# Altium PCB 11.PcbDoc
Units mil, origin at the board's own origin, x right, y up, seen from the top; angles counter-clockwise.
Board outline 4680 x 3125 mil, 2 copper layers (Top Layer, Bottom Layer); 68 components, 60 nets, 224 pads, 6 vias.
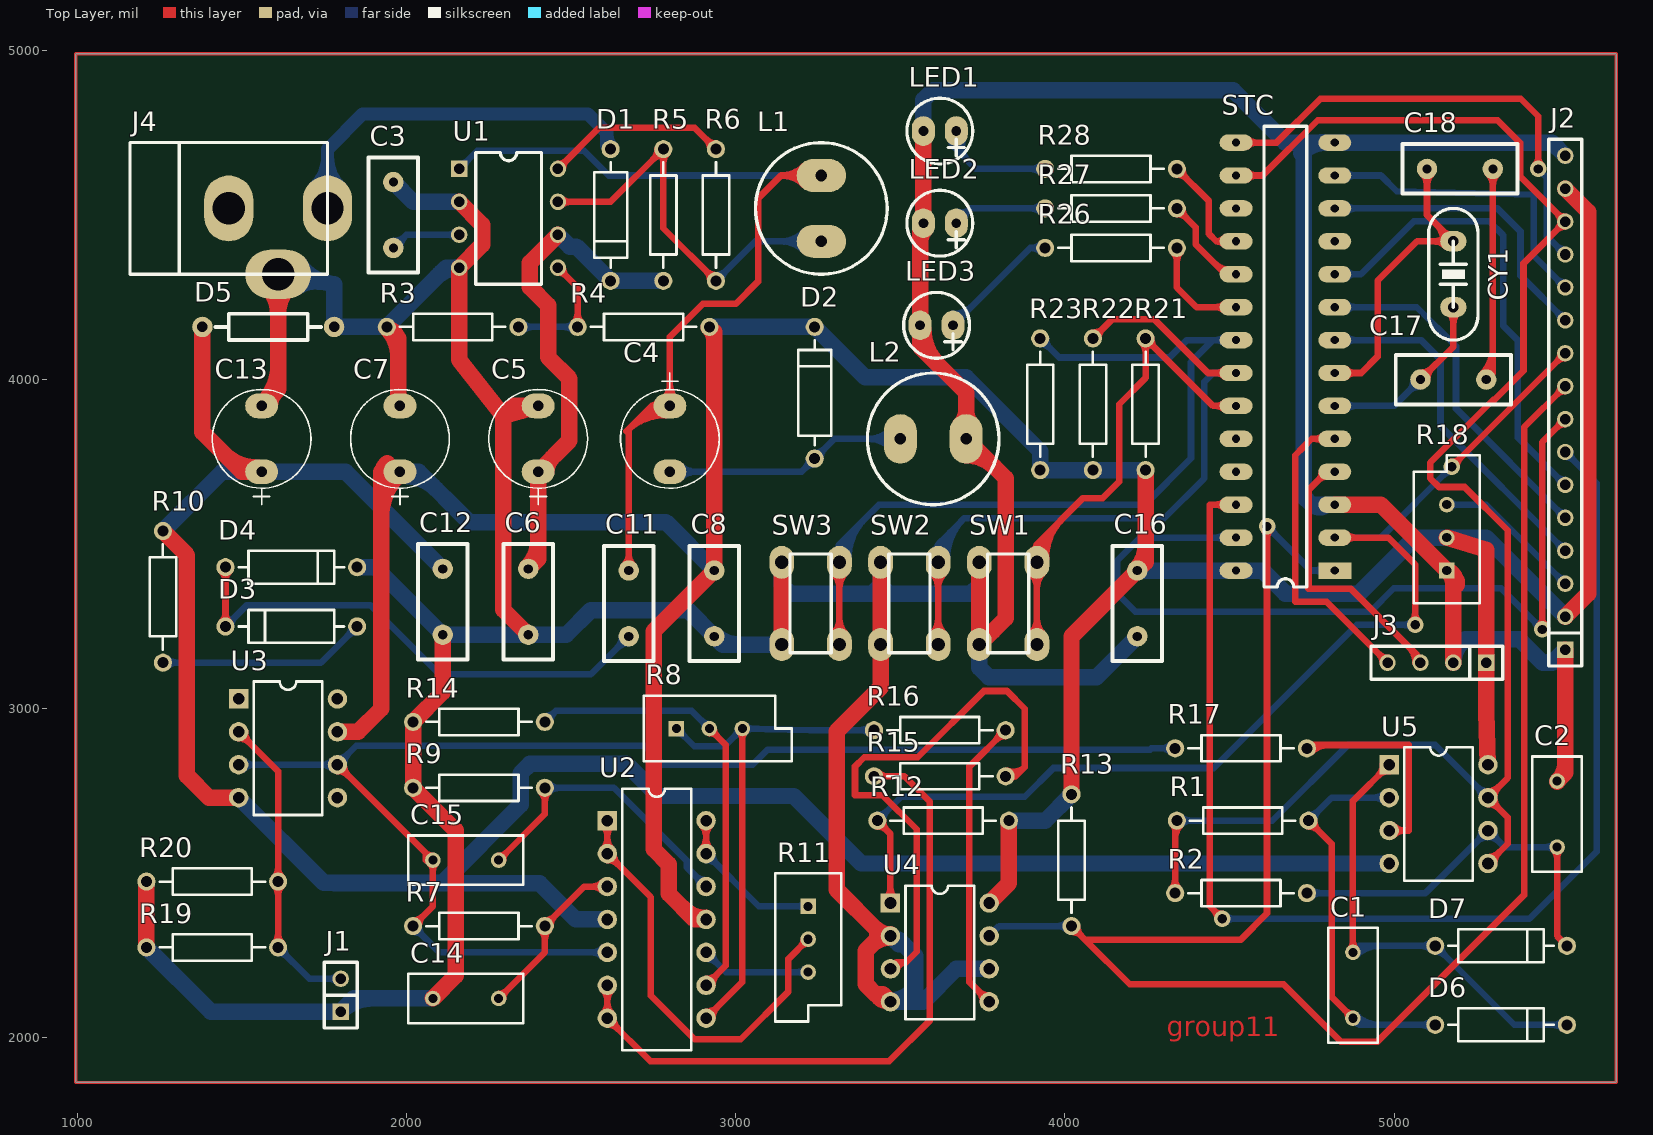
[diagram p0: Top Layer view]
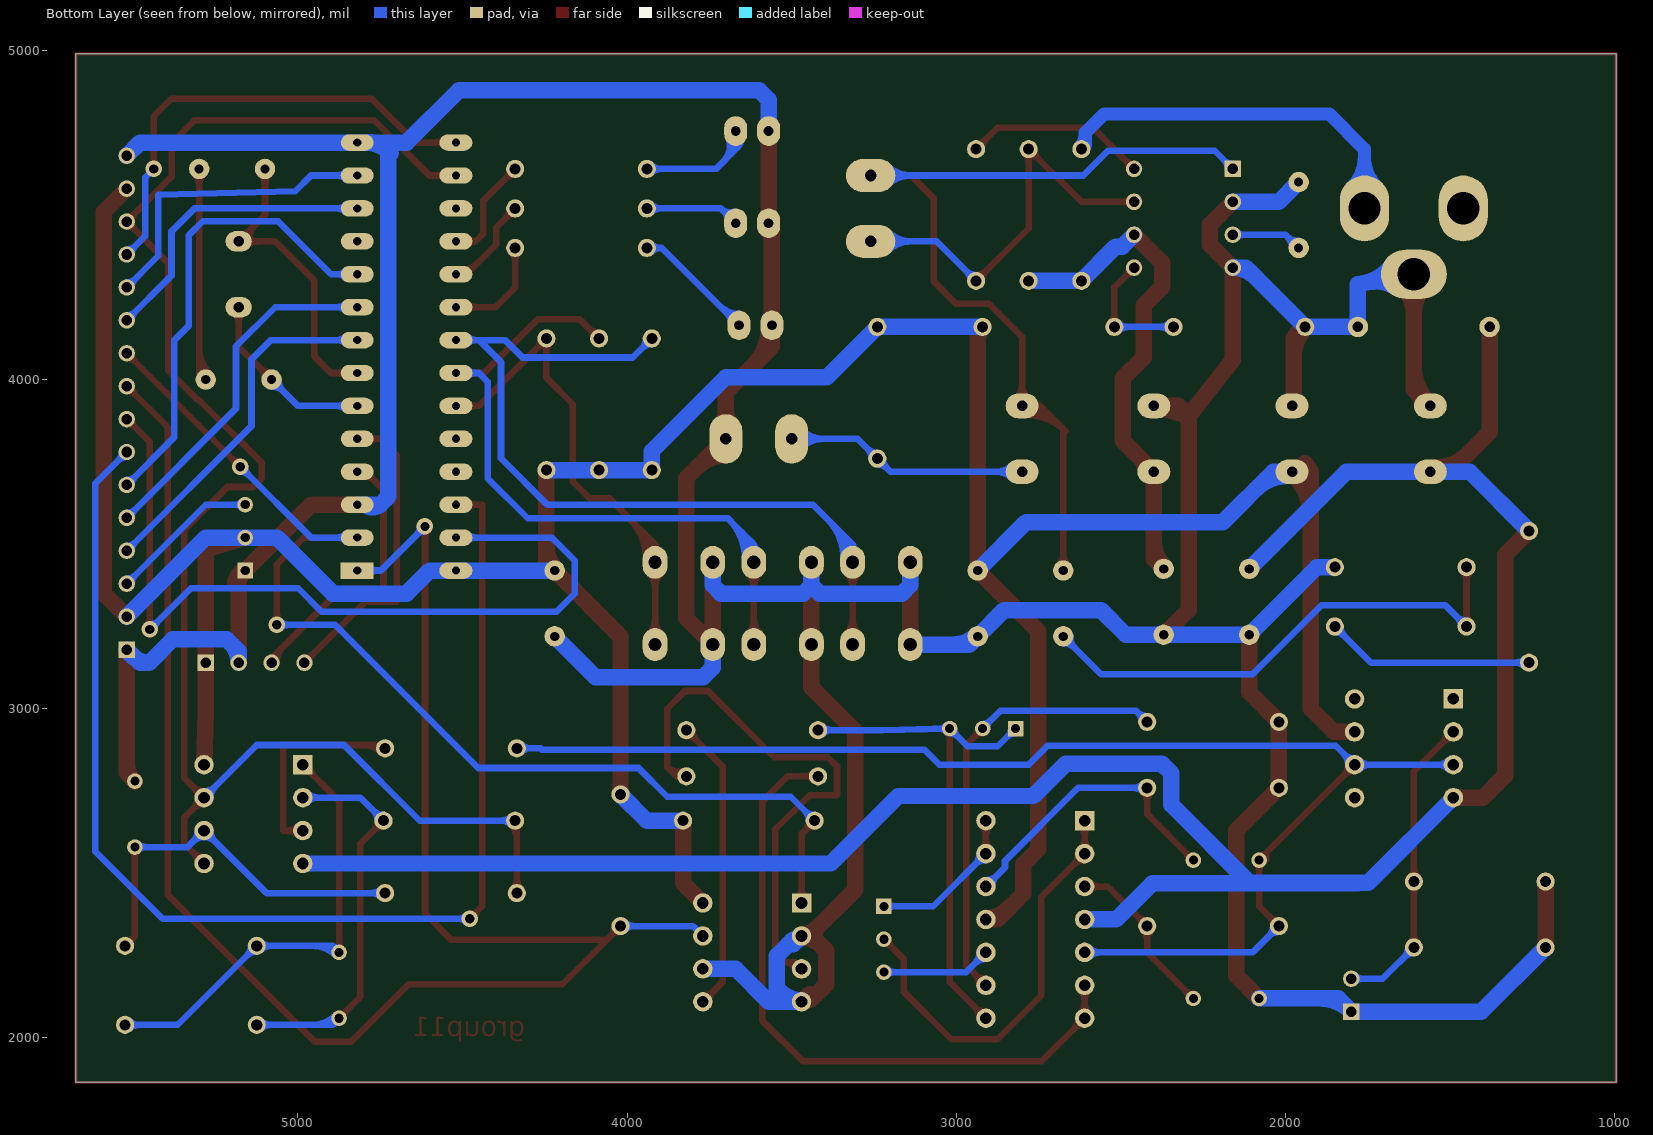
[diagram p1: Bottom Layer view, seen from below]

## Layer stack, top to bottom
Top Solder: solder mask 0.4, Solder Resist, Dk 3.5
Top Layer: signal copper 1.4
Dielectric1: dielectric 12.6, FR-4, Dk 4.8
Bottom Layer: signal copper 1.4
Bottom Solder: solder mask 0.4, Solder Resist, Dk 3.5

## Board outline
995,4990 995,1865 5675,1865 5675,4990 995,4990

## Design rules (kind name [scope] priority, off if disabled: settings)
Clearance [All] p1: gap=20
FabricationTestPointUsage TestPointUsage [All] p1: valid=0 allowmultiple=FALSE
FabricationTestpoint Testpoint [All] p1: side=3 testpointundercomponent=TRUE minsize=40 maxsize=100 preferedsize=60 minholesize=0 maxholesize=40 preferedholesize=32 testpointgrid=1 allowsidetop=TRUE allowsidebottom=TRUE usegrid=TRUE gridtolerance=0.01
PolygonConnect [All] p1: connectstyle=Relief reliefconductorwidth=10 reliefentries=4 polygonreliefangle="90 Angle" airgapwidth=10
RoutingVias [All] p1: holewidth=28 width=50 viastyle="Through Hole" minholewidth=28 minwidth=50 maxholewidth=28 maxwidth=50
SilkToSolderMaskClearance SilkscreenOverComponentPads [IsPad] p1: minsilkscreentomaskgap=10 clearancetoexposedcopper=TRUE
SolderMaskExpansion [All] p1: expansion=4
Width 12 [InNet('NetD1_1')] p1: maxlimit=60 minlimit=40 preferedwidth=50
Width gnd [InNet('GND')] p2: maxlimit=60 minlimit=40 preferedwidth=50
Width -vcc [InNet('-5V')] p3: maxlimit=60 minlimit=40 preferedwidth=50
Width vcc [InNet('+5V')] p4: maxlimit=60 minlimit=40 preferedwidth=50
Width [All] p5: maxlimit=30 minlimit=15 preferedwidth=20
26 further rules are at their usual default settings.

## Components (designator, comment, footprint, x,y, rotation, side; value= is the part's Value field where it differs from the comment)
C1 "Cap" RAD-0.2 4875,2160 r90 top
C2 "Cap" RAD-0.2 5495,2680 r270 top
C3 "471" RAD0.2 1960,4600 r270 top
C4 "47uF/25V" RB.2/.3 2800,3920 r270 top
C5 "470uF/25V" RB.2/.3 2400,3720 r90 top
C6 "104" RAD0.2 2370,3425 r270 top
C7 "220uF" RB.2/.3 1980,3720 r90 top
C8 "104" RAD0.2 2935,3420 r270 top
C11 "106" RAD0.2 2675,3420 r270 top
C12 "104" RAD0.2 2110,3425 r270 top
C13 "220uF" RB.2/.3 1560,3720 r90 top
C14 "Cap" RAD-0.2 2180,2120 r0 top
C15 "Cap" RAD-0.2 2180,2540 r0 top
C16 "CAP" RAD0.2 4220,3420 r270 top
C17 "33pF" RAD0.2 5080,4000 r0 top
C18 "33pF" RAD0.2 5300,4640 r180 top
CY1 "CRYSTAL" CY2 5180,4420 r270 top
D1 "Diode 1N4148" DIODE-0.4 2620,4500 r270 top
D2 "Diode 1N4148" DIODE-0.4 3240,3960 r90 top
D3 "Diode 1N4148" DIODE-0.4 1650,3250 r180 top
D4 "Diode 1N4148" DIODE-0.4 1650,3430 r0 top
D5 "5.1V" AXIAL0.4 1380,4160 r0 top
D6 "Diode 1N4148" DIODE-0.4 5325,2040 r0 top
D7 "Diode 1N4148" DIODE-0.4 5325,2280 r0 top
J1 "CON2" SIP2 1800,2080 r90 top
J2 "CON16" SIP16 5520,3180 r90 top
J3 "CON4" SIP4 5280,3140 r180 top
J4 "DCINPUT" DC-INPUT 1460,4520 r180 top
L1 "220uH" RB.2/.4 3260,4420 r270 top
L2 "220uH" RB.2/.4 3700,3820 r0 top
LED1 "LED" LED 3670,4755 r180 top
LED2 "LED" LED 3670,4475 r180 top
LED3 "LED" LED 3660,4165 r180 top
R1 "Res2" AXIAL-0.4 4540,2660 r180 top
R2 "Res2" AXIAL-0.4 4535,2440 r180 top
R3 "1.2K" AXIAL-0.4 2140,4160 r0 top
R4 "4.7K" AXIAL-0.4 2720,4160 r180 top
R5 "0.2R" AXIAL-0.4 2780,4500 r90 top
R6 "180R" AXIAL-0.4 2940,4500 r90 top
R7 "20K" AXIAL-0.4 2220,2340 r180 top
R8 "RPot" VR5 2920,2940 r0 top
R9 "20K" AXIAL-0.4 2220,2760 r0 top
R10 "180R" AXIAL-0.4 1260,3340 r270 top
R11 "47K" VR5 3220,2300 r270 top
R12 "Res2" AXIAL-0.4 3630,2660 r180 top
R13 "Res2" AXIAL-0.4 4020,2540 r270 top
R14 "Res2" AXIAL-0.4 2220,2960 r0 top
R15 "5K" AXIAL-0.4 3620,2795 r180 top
R16 "5K" AXIAL-0.4 3620,2935 r180 top
R17 "Res2" AXIAL-0.4 4535,2880 r180 top
R18 "RPot" VR5 5160,3520 r90 top
R19 "Res2" AXIAL-0.4 1410,2275 r0 top
R20 "Res2" AXIAL-0.4 1410,2475 r0 top
R21 "Res2" AXIAL-0.4 4245,3925 r270 top
R22 "Res2" AXIAL-0.4 4085,3925 r270 top
R23 "Res2" AXIAL-0.4 3925,3925 r270 top
R26 "Res2" AXIAL-0.4 4140,4400 r0 top
R27 "Res2" AXIAL-0.4 4140,4520 r0 top
R28 "Res2" AXIAL-0.4 4140,4640 r0 top
STC "STC" stc5616 4820,3420 r180 top
SW1 "SW-PB" SW-BP 3915,3195 r90 top
SW2 "SW-PB" SW-BP 3615,3195 r90 top
SW3 "SW-PB" SW-BP 3315,3195 r90 top
U1 "MC34063" DIP8 2160,4640 r0 top
U2 "LM324" DIP-14 2760,2360 r270 top
U3 "OP-07" DIP-8 1640,2880 r270 top
U4 "LM393" DIP-8 3620,2260 r270 top
U5 "LM358" DIP-8 5135,2680 r270 top

## Footprints (in the part's own frame and the unit in brackets; to place one, negate y for a bottom-side part, rotate by r counter-clockwise, add the part's x,y. Pads: shape width x height; smd on the part's side, far side on the other; paste and mask are expansions set on the pad)
AXIAL0.4 [mil]
  round 62 hole 32: 1(0,0) 2(400,0)
  silkscreen extent 40,-40 360,40
AXIAL-0.4 [mm] "Resistor; 2 Leads"
  round 1.4 hole 0.85: 1(-5.08,0) 2(5.08,0)
  silkscreen extent -4.06,-1.02 4.06,1.02
CY2 [mil]
  oval 62x80 hole 32: 1(0,0) 2(200,0)
  silkscreen extent -100,-75 300,75
DC-INPUT [mm]
  oval 3.81x5.08 hole 2.5: 1(-7.62,0) 3(0,0)
  oval 5.08x3.81 hole 2.5: 2(-3.81,5.08)
  silkscreen extent -7.62,-5.08 7.62,5.08
DIODE-0.4 [mm] "Tunnel Diode - Dependent Source Model; 2 Leads"
  round 1.4 hole 0.85: 1(-5.08,0) 2(5.08,0)
  silkscreen extent -4.06,-1.27 4.06,1.27
DIP8 [mil]
  rect 50x50 hole 32: 1(0,0)
  round 50 hole 32: 2(0,-100) 3(0,-200) 4(0,-300) 5(300,-300) 6(300,-200) 7(300,-100) 8(300,0)
  silkscreen extent 50,-350 250,50
DIP-8 [mm] "DIP; 8 Leads; Row Spacing 7.62 mm; Pitch 2.54 mm"
  rect 1.5x1.5 hole 0.9: 1(-3.81,-3.81)
  round 1.5 hole 0.9: 2(-1.27,-3.81) 3(1.27,-3.81) 4(3.81,-3.81) 5(3.81,3.81) 6(1.27,3.81) 7(-1.27,3.81) 8(-3.81,3.81)
  silkscreen extent -5.15,-2.65 5.15,2.65
DIP-14 [mm] "DIP; 14 Leads; Row Spacing 7.62 mm; Pitch 2.54 mm"
  rect 1.5x1.5 hole 0.9: 1(-7.62,-3.81)
  round 1.5 hole 0.9: 2(-5.08,-3.81) 3(-2.54,-3.81) 4(0,-3.81) 5(2.54,-3.81) 6(5.08,-3.81) 7(7.62,-3.81) 8(7.62,3.81) 9(5.08,3.81) 10(2.54,3.81) 11(0,3.81) 12(-2.54,3.81) 13(-5.08,3.81) 14(-7.62,3.81)
  silkscreen extent -10.1,-2.65 10.1,2.65
LED [mil]
  oval 70x90 hole 30: A(0,0) K(100,0)
  silkscreen extent -50,-100 150,100
RAD0.2 [mil]
  round 62 hole 28: 1(0,0) 2(200,0)
  silkscreen extent -75,-75 275,75
RAD-0.2 [mm] "Jumper Wire; 2 Leads"
  round 1.2 hole 0.7: 1(-2.54,0) 2(2.54,0)
  silkscreen extent -4.44,-1.91 4.44,1.91
RB.2/.3 [mil]
  oval 75x100 hole 32: 1(0,0) 2(200,0)
  silkscreen extent -100,-150 250,150
RB.2/.4 [mil]
  oval 100x150 hole 35: 1(0,0) 2(-200,0)
  silkscreen extent -300,-200 100,200
SIP2 [mil]
  rect 50x50 hole 32: 1(0,0)
  round 50 hole 32: 2(100,0)
  silkscreen extent -50,-50 150,50
SIP4 [mil]
  rect 50x50 hole 32: 1(0,0)
  round 50 hole 32: 2(100,0) 3(200,0) 4(300,0)
  silkscreen extent -50,-50 350,50
SIP16 [mil]
  rect 50x50 hole 32: 1(0,0)
  round 50 hole 32: 2(100,0) 3(200,0) 4(300,0) 5(400,0) 6(500,0) 7(600,0) 8(700,0) 9(800,0) 10(900,0) 11(1000,0) 12(1100,0) 13(1200,0) 14(1300,0) 15(1400,0) 16(1500,0)
  silkscreen extent -50,-50 1550,50
stc5616 [mil]
  rect 100x50 hole 25: 1(0,0)
  oval 100x50 hole 25: 2(0,-100) 3(0,-200) 4(0,-300) 5(0,-400) 6(0,-500) 7(0,-600) 8(0,-700) 9(0,-800) 10(0,-900) 11(0,-1000) 12(0,-1100) 13(0,-1200) 14(0,-1300) 15(300,-1300) 16(300,-1200) 17(300,-1100) 18(300,-1000) 19(300,-900) 20(300,-800) 21(300,-700) 22(300,-600) 23(300,-500) 24(300,-400) 25(300,-300) 26(300,-200) 27(300,-100) 28(300,0)
  silkscreen extent 85,-1350 215,50
SW-BP [mil]
  oval 100x75 hole 40: 1(0,0) 1(250,0) 2(0,175) 2(250,175)
  silkscreen extent -25,25 275,150
VR5 [mm] "Potentiometer; 3 Leads"
  rect 1.2x1.2 hole 0.7: 1(-2.54,0)
  round 1.2 hole 0.7: 2(0,0) 3(2.54,0)
  silkscreen extent -5.08,-2.54 6.35,2.54

## Part data
C1 C2 C14 C15: "Capacitor"
C3 C6 C8 C11 C12: library part CAP, "Capacitor"
C4 C5 C7 C13: library part ELECTRO2, "Electrolytic Capacitor"
C17 C18: library part CAP
D1 D2 D3 D4 D6 D7: "High Conductance Fast Diode"
D5: library part ZENER2, "Zener Diode"
J4: library part PWR2.5, "Low Voltage Power Supply Connector"
L1 L2: library part INDUCTOR2
R1 R2 R12 R13 R14 R17 R19 R20 R21 R22 R23 R26 R27 R28: "Resistor"
R3 R4 R5 R6 R7 R9 R10 R15 R16: library part Res2, "Resistor"
R8 R18: "Potentiometer"
R11: library part RPot, "Potentiometer"
STC: library part Component_1

## Via types
v1: diameter 50, hole 28, Top Layer to Bottom Layer, 6 vias

## Nets (pads, with @x,y where several pads share a name; then routed paths per layer and width w, separated by ;. In a path a pad name is that pad's centre, name@x,y a point inside that pad or via, vN(x,y) a via of type N, cw(c..) or ccw(c..) an arc to the next point about the centre after c; other vN are vias at no path point)
+5V: C7.1 C8.1 C16.1 D2.2 J2.2 J2.15 J3.1 R4.1 R12.1 R13.1 R18.2 R21.2 R22.2 R23.2 STC.28 U2.11 U3.7 U4.8 U5.8 | length 11301.5
  Top Layer w50: U3.7 1853,2930 1923,3000 1923,3720 C7.1 ; 1923,3582.39 cw(c2105.11,3582.39) C7.1@1976.34,3711.16 ; 1923,3703.1 cw(c1984.4,3703.1) C7.1@1940.98,3746.52 ; 2842.52,2392.48 ccw(c2910,2459.96) U2.11@2910,2364.53 ; U2.11 2875,2360 2796.63,2438.37 2796.63,2527.38 2751,2573.01 2751,3236 C8.1 2935,4145 R4.1 ; R4.1@2918.19,4158.19 cw(c2877.61,4117.61) 2935,4117.61 ; U4.8 3830,2470 R12.1 ; R13.1 4020,3220 C16.1 4245,3445 R21.2 ; C16.1@4215.76,3424.24 ccw(c4145.16,3494.84) 4245,3494.84 ; R18.2 5280,3483 J3.1 5280,2990 U5.8 ; J2.2 5590,3350 5590,4510 J2.15
  Bottom Layer w50: C7.1 2037,3720 2190,3567 2788,3567 C8.1 ; C7.1@1992.5,3707.5 cw(c1992.5,3569.89) 2089.81,3667.19 ; C7.1@1997.76,3708.66 cw(c2020.7,3659.2) 2059.25,3697.75 ; R4.1 D2.2 3393,4007 3700,4007 3925,3782 R23.2 R22.2 R21.2 ; R12.1 3940,2660 R13.1 ; C16.1 STC.28 4600,3420 4670,3350 4893.5,3350 5063.5,3520 R18.2 5280,3520 J2.2
-5V: C12.1 C13.1 D5.1 R10.1 U2.4 U3.4 U5.4 | length 7808.5
  Top Layer w50: R10.1 1333,3467 1333,2797 1400,2730 U3.4 ; D5.1 1380,3840 1500,3720 C13.1 ; 1445.07,3774.93 ccw(c1547.5,3877.35) C13.1@1547.5,3732.5
  Bottom Layer w50: R10.1 1440,3720 C13.1 1815,3720 C12.1 ; U3.4 1749,2471 1779,2471 ; U2.4 2514,2360 2404,2470 1780,2470 1779,2471 ; U5.4 3381,2530 3176,2735 2765.63,2735 2668.07,2832.56 2375,2832.56 2347,2804.56 2347,2709 2109,2471 ; 1779,2471 2109,2471 ; 1779,2471 2109,2471
"E P34": J2.6 STC.10 | length 1546.2
  Bottom Layer w20: STC.10 4899,4320 5060,4481 5289.04,4481 5331,4439.04 5331,4164 5376,4119 5376,3824 J2.6 ; STC.10@4855.61,4309.39 cw(c4881.21,4283.79) 4881.21,4320 cw(c4881.21,4356.21) STC.10@4855.61,4330.61 ; J2.6@5505,3680 ccw(c5468.79,3680) 5494.39,3705.61 ccw(c5520,3731.21) J2.6@5520,3695
GND: C2.1 C3.1 C5.2 C6.2 C7.2 C8.2 C12.2 C13.2 C14.1 C16.2 D4.2 D5.2 J1.1 J2.1 J2.16 J3.2 J4.2 L2.1 LED1.K LED2.K LED3.K R3.1 R9.1 R14.1 R18.1 R19.1 R20.1 STC.3 STC.14 SW1.2 SW2.2 SW3.2 U1.2 U1.4 U4.2 U4.4 U4.6 | length 20586.6
  Top Layer w50: R19.1 R20.1 ; C13.2 1610,3970 J4.2 ; C13.2@1563.66,3928.84 ccw(c1451.79,4040.71) 1610,4040.71 ; J4.2@1574.64,4284.64 cw(c1489.29,4199.29) 1610,4199.29 cw(c1730.71,4199.29) J4.2@1645.36,4284.64 ; C13.2@1585,3920 cw(c1645.36,3920) 1602.68,3962.68 ; R3.1@1938.19,4158.19 cw(c1849.32,4069.32) 1975,4069.32 ; R3.1@1939.31,4157.54 cw(c1926.17,4110.5) 1975,4110.5 ; R3.1 1975,4125 1975,3925 C7.2 ; 1975,3962.25 ccw(c2022.25,3962.25) C7.2@1988.84,3928.84 ; C14.1 2149,2189 2149,2631 R9.1 R14.1 2110,3050 C12.2 ; U1.2 2230,4470 2230,4410 U1.4 2160,4060 2294,3889 ; 2293.75,3888.75 cw(c2353.67,3828.83) C5.2@2383.15,3908.28 ; 2351.39,3905.78 ccw(c2339.56,3946.25) C5.2@2376.54,3926 ; C6.2 2294,3301 2294,3889 ; SW3.2@3140,3195 SW3.2@3140,3445 ; 3411.06,2281.06 cw(c3470,2222.12) U4.2@3470,2305.47 ; 3415,2285 cw(c3464.85,2235.16) U4.2@3469.69,2305.48 ; 3423.53,2333.78 ccw(c3470,2380.25) U4.2@3470,2314.53 ; 3424.71,2133.29 ccw(c3470,2178.57) U4.4@3470,2114.53 ; 3436,2122 ccw(c3458.52,2144.52) U4.4@3468.57,2114.3 ; SW2.2@3440,3445 3440,3195 3440,3065 3307.44,2932.44 3307.44,2449.87 3430,2327.31 3430,2310 3430,2300 3395.47,2265.47 3395.47,2162.53 3425,2133 ; U4.4@3465.97,2107.94 ccw(c3425,2086.99) 3425,2133 ; U4.4 3447,2133 3425,2133 ; 3560,4416.72 cw(c3618.28,4416.72) LED2.K@3577.07,4457.93 ; LED3.K@3570,4155 ccw(c3726.92,4155) 3615.96,4044.04 ; LED1.K LED2.K 3560,4465 LED3.K 3560,4100 3700,3960 L2.1 3820,3700 3820,3275 3740,3195 SW1.2@3740,3445 ; L2.1@3682.32,3862.68 ccw(c3639.64,3905.36) 3700,3905.36 ccw(c3760.36,3905.36) L2.1@3717.68,3862.68 ; L2.1@3700,3770 cw(c3700,3649.29) 3785.36,3734.64 ; SW1.2@3740,3220 ccw(c3740,3280.36) 3782.68,3237.68 ; STC.3 4960,3620 R18.1 5191,3389 5180,3378 J3.2 ; R18.1@5160.51,3421.28 cw(c5142.37,3376.16) 5191,3376.16 ; C2.1 5520,2805 J2.1 ; C2.1@5495.97,2779.03 ccw(c5437.97,2837.03) 5520,2837.03 ; 2294,3889 C5.2 2325,3920 2294,3889 ; R18.1@5160.97,3420.97 cw(c5115.04,3375.04) 5180,3375.04 ccw(c5115.04,3375.04) R18.1@5160.97,3420.97
  Bottom Layer w50: R19.1 1405,2080 J1.1 ; J4.2 1780,4290 D5.2 R3.1 2120,4340 U1.4 ; J4.2@1663.67,4279.04 cw(c1724.39,4192.3) 1742.79,4296.57 ; J4.2@1675.96,4348.67 ccw(c1787,4426.4) 1763.45,4292.92 ; D4.2 1905,3430 C12.2 C6.2 2485,3225 2560,3300 2855,3300 C8.2 2960,3195 SW3.2@3140,3195 ; 1896.57,2120 ccw(c1896.57,1983.43) J1.1 ; C3.1 2020,4540 U1.2 ; C14.1 1840,2120 J1.1 ; 2091.72,4311.72 cw(c2160,4243.43) U1.4 ; 2100,4320 cw(c2150,4270.01) U1.4 ; C8.2@2939.24,3224.24 ccw(c3009.84,3294.84) 3009.84,3195 ; SW3.2@3140,3445 3140,3375 3165,3350 3415,3350 3440,3375 ; SW2.2@3440,3445 3440,3375 ; U4.4@3470,2114.53 ccw(c3470,2209.96) 3537.48,2142.48 ; U4.2 3495,2285 3510,2285 ; U4.2@3474.33,2311.33 ccw(c3510,2322.33) 3510,2285 ; LED1.K 3570,4850 3599,4879 4511,4879 4670,4720 4750,4720 ; SW1.2@3740,3195 3740,3125 3769,3096 4096,3096 C16.2 ; SW1.2@3740,3445 3740,3375 3715,3350 3465,3350 3440,3375 ; U4.6 3670,2210 3570,2110 3505,2110 ; 4718.18,4688.18 cw(c4795,4611.36) 4795,4720 ccw(c4783.75,4641.26) 4727.5,4697.5 ; 4747.5,3622.5 ccw(c4772.64,3647.64) STC.3@4795,3620 ; STC.3 4750,3620 4725,3645 4725,4695 4750,4720 ; 5204.75,3199.75 ccw(c5264.5,3140) J3.2 5180,3175 5216,3211 5380,3211 5451,3140 ; J2.16 5480,4720 STC.14 4750,4720 ; 3505,2110 U4.4 3505,2110 ; 3505,2110 3545,2150 3545,2250 3510,2285 ; 5451,3140 ccw(c5451,3219.51) J2.1 5480,3140 5451,3140 ; U4.2@3470,2305.47 cw(c3470,2258.33) 3503.34,2291.66 ccw(c3470,2258.33) U4.2@3470,2305.47
NetC1_1: C1.1 D6.1 R1.1 U5.2 | length 1634.7
  Top Layer w20: R1.1@4740,2642.44 cw(c4740,2600.05) 4769.98,2630.02 cw(c4799.95,2660) R1.1@4757.56,2660 ; R1.1 4810,2590 4810,2125 C1.1 ; C1.1@4861.38,2060 ccw(c4828.49,2060) 4851.75,2083.25 ccw(c4875,2106.51) C1.1@4875,2073.62
  Bottom Layer w20: R1.1 4810,2730 U5.2 ; R1.1@4740,2677.56 ccw(c4740,2719.95) 4769.98,2689.98 ccw(c4799.95,2660) R1.1@4757.56,2660 ; C1.1@4870.49,2055.49 ccw(c4907.89,2092.89) 4907.89,2040 ; C1.1 4895,2040 D6.1 ; C1.1@4884.63,2069.63 ccw(c4956.17,2141.17) 4956.17,2040 ; U5.2@4971.19,2716.19 ccw(c4937.86,2682.86) 4937.86,2730 ccw(c4937.86,2777.14) U5.2@4971.19,2743.81 ; D6.1@5112.58,2027.58 ccw(c5082.61,1997.61) 5082.61,2040 ccw(c5082.61,2082.39) D6.1@5112.58,2052.42
NetC1_2: C1.2 D6.2 D7.1 U5.1 | length 1819.7
  Top Layer w20: C1.2@4865.37,2269.63 ccw(c4842.11,2292.89) 4875,2292.89 ccw(c4907.89,2292.89) C1.2@4884.63,2269.63 ; C1.2 4875,2720 U5.1 ; U5.1@4965.47,2830 cw(c4918.33,2830) 4951.66,2796.66 cw(c4985,2763.33) U5.1@4985,2810.47
  Bottom Layer w20: C1.2@4870.49,2264.51 cw(c4907.89,2227.11) 4907.89,2280 ; C1.2 4895,2280 D7.1 5365,2040 D6.2 ; C1.2@4884.63,2250.37 cw(c4956.17,2178.83) 4956.17,2280 ; D7.1@5112.58,2267.58 ccw(c5082.61,2237.61) 5082.61,2280 ccw(c5082.61,2322.39) D7.1@5112.58,2292.42 ; D7.1@5125,2262.44 cw(c5125,2220.05) 5154.98,2250.02 cw(c5184.95,2280) D7.1@5142.56,2280 ; D6.2@5512.58,2027.58 ccw(c5482.61,1997.61) 5482.61,2040 ccw(c5482.61,2082.39) D6.2@5512.58,2052.42
NetC2_2: C2.2 D7.2 R2.1 U5.6 | length 1489.8
  Top Layer w20: C2.2@5485.37,2570.37 cw(c5462.11,2547.11) 5495,2547.11 cw(c5527.89,2547.11) C2.2@5504.63,2570.37 ; C2.2 5495,2310 D7.2
  Bottom Layer w20: R2.1 5095,2440 U5.6 5335,2580 C2.2 ; R2.1@4747.42,2427.58 cw(c4777.39,2397.61) 4777.39,2440 cw(c4777.39,2482.39) R2.1@4747.42,2452.42 ; U5.6@5265.47,2630 cw(c5218.33,2630) 5251.66,2596.66 cw(c5285,2563.33) 5285,2610.47 cw(c5285,2563.33) 5318.34,2596.66 cw(c5351.67,2630) U5.6@5304.53,2630 ; C2.2@5485.37,2570.37 ccw(c5462.11,2547.11) 5462.11,2580 ccw(c5462.11,2612.89) C2.2@5485.37,2589.63
NetC3_2: C3.2 U1.3 | length 353.1
  Bottom Layer w20: C3.2 2000,4440 U1.3 ; C3.2@1960,4421 ccw(c1960,4471.7) 1995.85,4435.85 ccw(c2031.7,4400) C3.2@1981,4400 ; U1.3@2149.39,4429.39 ccw(c2123.79,4403.79) 2123.79,4440 ccw(c2123.79,4476.21) U1.3@2149.39,4450.61
NetC4_1: C4.1 C11.1 L1.2 U1.1 | length 3729.3
  Top Layer w20: C11.1@2660.15,3434.85 ccw(c2624.3,3470.7) 2675,3470.7 ccw(c2725.7,3470.7) C11.1@2689.85,3434.85 ; 2668,3843 cw(c2787.5,3723.51) C4.1@2787.5,3892.5 ; C11.1 2675,3850 2745,3920 ; 2702.14,3877.14 cw(c2787.5,3791.79) C4.1@2787.5,3912.5 ; 2723.75,3898.75 cw(c2746.84,3875.66) C4.1@2768.92,3899.73 ; 2736.29,3911.29 cw(c2787.5,3860.07) C4.1@2787.5,3932.5 ; 2738.52,3913.52 cw(c2760.97,3891.07) C4.1@2782.43,3914.47 ; C4.1@2762.41,3908.73 ccw(c2745,3900.91) 2745,3920 ; C4.1@2762.41,3931.27 cw(c2745,3939.09) 2745,3920 ; C4.1@2780.55,3939.45 ccw(c2733.61,3986.39) 2800,3986.39 ccw(c2866.39,3986.39) C4.1@2819.45,3939.45 ; L1.2@3206.72,4591.72 ccw(c3138.43,4523.43) 3138.43,4620 ccw(c3138.43,4716.57) L1.2@3206.72,4648.28 ; L1.2 3138,4620 3068,4550 3068,4298 3000,4230 2900,4230 2800,4130 C4.1 2745,3920
  Bottom Layer w20: U1.1 2215,4695 2539,4695 2614,4620 L1.2 ; U1.1@2160,4655 ccw(c2160,4691.21) 2185.61,4665.61 ccw(c2211.21,4640) U1.1@2175,4640 ; L1.2@3206.72,4591.72 ccw(c3138.43,4523.43) 3138.43,4620 ccw(c3138.43,4716.57) L1.2@3206.72,4648.28
NetC4_2: C4.2 D2.1 L2.2 | length 1130.6
  Bottom Layer w20: C4.2 3200,3720 D2.1 3300,3820 L2.2 ; C4.2@2831.95,3700.55 cw(c2878.89,3653.61) 2878.89,3720 cw(c2878.89,3786.39) C4.2@2831.95,3739.45 ; D2.1@3222.44,3760 cw(c3180.05,3760) 3210.02,3730.02 cw(c3240,3700.05) D2.1@3240,3742.44 ; D2.1@3240,3777.56 ccw(c3240,3819.95) 3269.98,3789.98 ccw(c3299.95,3760) D2.1@3257.56,3760 ; L2.2@3471.72,3791.72 ccw(c3403.43,3723.43) 3403.43,3820 ccw(c3403.43,3916.57) L2.2@3471.72,3848.28
NetC5_1: C5.1 C6.1 D1.2 R5.1 U1.6 | length 1668.9
  Top Layer w50: C6.1@2365.76,3429.24 ccw(c2283.09,3511.91) 2400,3511.91 ; C6.1 2400,3455 C5.1 2495,3815 2495,4003 2430,4068 2430,4226 2375,4281 2375,4355 U1.6 ; C5.1@2425,3720 cw(c2485.36,3720) 2442.68,3762.68
  Bottom Layer w50: U1.6 2496,4404 2516,4404 D1.2 R5.1
NetC11_2: C11.2 D3.2 D4.1 | length 1845.9
  Top Layer w20: D3.2@1437.58,3262.42 ccw(c1407.61,3292.39) 1450,3292.39 ccw(c1492.39,3292.39) D3.2@1462.42,3262.42 ; D4.1@1437.58,3417.58 cw(c1407.61,3387.61) 1450,3387.61 cw(c1492.39,3387.61) D4.1@1462.42,3417.58 ; D3.2 D4.1
  Bottom Layer w20: D3.2 1515,3315 1890,3315 2100,3105 2560,3105 C11.2 ; D3.2@1450,3267.56 ccw(c1450,3309.95) 1479.98,3279.98 ccw(c1509.95,3250) D3.2@1467.56,3250 ; C11.2@2654,3220 cw(c2603.3,3220) 2639.15,3184.15 cw(c2675,3148.3) C11.2@2675,3199
NetC14_2: C14.2 R7.1 U2.3 | length 776.6
  Top Layer w20: C14.2 2420,2260 R7.1 2540,2460 U2.3 ; C14.2@2280,2133.62 ccw(c2280,2166.51) 2303.25,2143.25 ccw(c2326.51,2120) C14.2@2293.62,2120 ; R7.1@2407.58,2327.58 cw(c2377.61,2297.61) 2420,2297.61 cw(c2462.39,2297.61) R7.1@2432.42,2327.58 ; R7.1@2420,2357.56 ccw(c2420,2399.95) 2449.98,2369.98 ccw(c2479.95,2340) R7.1@2437.56,2340 ; U2.3@2596.19,2446.19 ccw(c2562.86,2412.86) 2562.86,2460 ccw(c2562.86,2507.14) U2.3@2596.19,2473.81
NetC15_2: C15.2 R9.2 U2.12 | length 1162.9
  Top Layer w20: C15.2 2420,2680 R9.2 ; C15.2@2280,2553.62 ccw(c2280,2586.51) 2303.25,2563.25 ccw(c2326.51,2540) C15.2@2293.62,2540 ; R9.2@2407.58,2747.58 cw(c2377.61,2717.61) 2420,2717.61 cw(c2462.39,2717.61) R9.2@2432.42,2747.58
  Bottom Layer w20: R9.2 2630,2760 2852,2538 2852,2518 U2.12 ; R9.2@2432.42,2747.58 cw(c2462.39,2717.61) 2462.39,2760 cw(c2462.39,2802.39) R9.2@2432.42,2772.42 ; U2.12@2890.47,2460 ccw(c2843.33,2460) 2876.66,2493.34 ccw(c2910,2526.67) U2.12@2910,2479.53
NetC17_2: C17.2 C18.1 | length 876.9
  Top Layer w20: C17.2@5265.15,4014.85 ccw(c5181.02,4098.98) 5300,4098.98 ; C17.2@5279.29,4000.71 ccw(c5229.3,4050.7) 5300,4050.7 ; C17.2 5300,4020 C18.1 ; C18.1@5285.15,4625.15 cw(c5249.3,4589.3) 5300,4589.3 cw(c5350.7,4589.3) C18.1@5314.85,4625.15
NetD1_1: D1.1 J4.1 | length 1406
  Bottom Layer w40: J4.1@1721.11,4583.89 ccw(c1627.22,4677.78) 1760,4677.78 ccw(c1892.78,4677.78) J4.1@1798.89,4583.89 ; J4.1 1760,4700 1867,4807 2551,4807 2608,4750 2608,4712 D1.1 ; 2608,4747.22 ccw(c2667.22,4747.22) D1.1@2625.35,4705.35
NetD3_1: D3.1 R10.2 | length 768.7
  Bottom Layer w20: R10.2 1740,3140 D3.1 ; R10.2@1272.42,3127.58 cw(c1302.39,3097.61) 1302.39,3140 cw(c1302.39,3182.39) R10.2@1272.42,3152.42 ; D3.1@1832.44,3250 cw(c1790.05,3250) 1820.02,3220.02 cw(c1850,3190.05) D3.1@1850,3232.44
NetJ1_2: J1.2 R19.2 R20.2 U3.2 | length 1331.3
  Top Layer w20: U3.2@1490,2910.47 cw(c1490,2863.33) 1523.34,2896.66 cw(c1556.67,2930) U3.2@1509.53,2930 ; U3.2 1610,2810 R20.2 R19.2 ; R19.2@1597.58,2287.42 ccw(c1567.61,2317.39) 1610,2317.39 ccw(c1652.39,2317.39) R19.2@1622.42,2287.42 ; R20.2@1597.58,2462.58 cw(c1567.61,2432.61) 1610,2432.61 cw(c1652.39,2432.61) R20.2@1622.42,2462.58 ; R20.2@1597.58,2487.42 ccw(c1567.61,2517.39) 1610,2517.39 ccw(c1652.39,2517.39) R20.2@1622.42,2487.42
  Bottom Layer w20: R19.2@1610,2257.44 cw(c1610,2215.05) 1639.98,2245.02 cw(c1669.95,2275) R19.2@1627.56,2275 ; R19.2 1705,2180 J1.2 ; J1.2@1789.39,2169.39 ccw(c1763.79,2143.79) 1763.79,2180 ccw(c1763.79,2216.21) J1.2@1789.39,2190.61
NetJ2_3: J2.3 R18.3 | length 568
  Bottom Layer w20: R18.3 5280,3620 J2.3 ; R18.3@5169.63,3610.37 cw(c5192.89,3587.11) 5192.89,3620 cw(c5192.89,3652.89) R18.3@5169.63,3629.63 ; J2.3@5505,3380 ccw(c5468.79,3380) 5494.39,3405.61 ccw(c5520,3431.21) J2.3@5520,3395
NetJ4_3: J4.3
NetL1_1: L1.1 R5.2 R6.1 U1.7 | length 1697.2
  Top Layer w20: U1.7 2620,4540 R5.2 2780,4460 R6.1 ; U1.7@2470.61,4529.39 cw(c2496.21,4503.79) 2496.21,4540 cw(c2496.21,4576.21) U1.7@2470.61,4550.61 ; R5.2@2762.44,4700 cw(c2720.05,4700) 2750.02,4670.02 cw(c2780,4640.05) R5.2@2780,4682.44 ; R5.2@2767.58,4687.58 cw(c2737.61,4657.61) 2780,4657.61 cw(c2822.39,4657.61) R5.2@2792.42,4687.58 ; R6.1@2922.44,4300 ccw(c2880.05,4300) 2910.02,4329.98 ccw(c2940,4359.95) R6.1@2940,4317.56
  Bottom Layer w20: R6.1 3060,4420 L1.1 ; R6.1@2940,4317.56 ccw(c2940,4359.95) 2969.98,4329.98 ccw(c2999.95,4300) R6.1@2957.56,4300 ; L1.1@3206.72,4391.72 ccw(c3138.43,4323.43) 3138.43,4420 ccw(c3138.43,4516.57) L1.1@3206.72,4448.28
NetLED1_A: LED1.A R28.1 | length 722.8
  Bottom Layer w20: LED1.A@3656.15,4750.77 ccw(c3695.07,4734.55) 3665.26,4704.74 ; LED1.A 3670,4700 ; LED1.A@3674.62,4743.08 ccw(c3724.89,4722.13) 3686.38,4683.62 ; LED1.A@3693.08,4735.39 ccw(c3754.71,4709.71) 3707.5,4662.5 ; R28.1@3927.58,4627.58 ccw(c3897.61,4597.61) 3897.61,4640 ccw(c3897.61,4682.39) R28.1@3927.58,4652.42 ; R28.1 3730,4640 3670,4700 ; 3670,4700 ccw(c3642,4700) 3656.79,4723.77 cw(c3642,4700) 3670,4700 ; 3670,4700 cw(c3698,4700) 3683.21,4723.77 ccw(c3698,4700) 3670,4700
NetLED2_A: LED2.A R27.1 | length 425.9
  Bottom Layer w20: LED2.A 3715,4520 ; LED2.A@3676.09,4509.25 ccw(c3686.06,4548.93) 3715,4520 ; LED2.A@3695,4485 cw(c3731.21,4485) 3705.61,4510.61 ; R27.1@3927.58,4507.58 ccw(c3897.61,4477.61) 3897.61,4520 ccw(c3897.61,4562.39) R27.1@3927.58,4532.42 ; R27.1 3715,4520
NetLED3_A: LED3.A R26.1 | length 538.7
  Bottom Layer w20: LED3.A 3895,4400 R26.1 ; LED3.A@3660,4200 ccw(c3660,4284.5) 3719.75,4224.75 ; LED3.A@3685,4175 cw(c3721.21,4175) 3695.61,4200.61 ; R26.1@3927.58,4387.58 ccw(c3897.61,4357.61) 3897.61,4400 ccw(c3897.61,4442.39) R26.1@3927.58,4412.42
NetR3_2: R3.2 R4.2 U1.5 | length 641.5
  Top Layer w20: U1.5@2460,4325 cw(c2460,4288.79) 2485.61,4314.39 cw(c2511.21,4340) U1.5@2475,4340 ; U1.5 2520,4280 R4.2 ; R4.2@2507.58,4172.42 ccw(c2477.61,4202.39) 2520,4202.39 ccw(c2562.39,4202.39) R4.2@2532.42,4172.42
  Bottom Layer w20: R3.2 R4.2 ; R3.2@2352.42,4147.58 cw(c2382.39,4117.61) 2382.39,4160 cw(c2382.39,4202.39) R3.2@2352.42,4172.42 ; R4.2@2507.58,4147.58 ccw(c2477.61,4117.61) 2477.61,4160 ccw(c2477.61,4202.39) R4.2@2507.58,4172.42
NetR6_2: R6.2 U1.8 | length 682.2
  Top Layer w20: U1.8 2585,4765 2875,4765 R6.2 ; U1.8@2460,4655 ccw(c2460,4691.21) 2485.61,4665.61 ccw(c2511.21,4640) U1.8@2475,4640 ; R6.2@2922.44,4700 ccw(c2880.05,4700) 2910.02,4729.98 ccw(c2940,4759.95) R6.2@2940,4717.56
NetR8_2: R8.2 R14.2 U2.9 | length 1606
  Top Layer w20: U2.9 2970,2220 2970,2890 R8.2 ; U2.9@2910,2179.53 ccw(c2910,2226.67) 2943.34,2193.34 ccw(c2976.67,2160) U2.9@2929.53,2160 ; R8.2@2920,2926.38 cw(c2920,2893.49) 2943.25,2916.75 cw(c2966.51,2940) R8.2@2933.62,2940
  Bottom Layer w20: R14.2 2454,2994 2866,2994 R8.2 ; R14.2@2420,2977.56 ccw(c2420,3019.95) 2449.98,2989.98 ccw(c2479.95,2960) R14.2@2437.56,2960 ; R8.2@2906.38,2940 ccw(c2873.49,2940) 2896.75,2963.25 ccw(c2920,2986.51) R8.2@2920,2953.62
NetR11_1: R11.1 U2.13 U2.14 | length 750.1
  Top Layer w20: U2.13@2896.19,2573.81 ccw(c2862.86,2607.14) 2910,2607.14 ccw(c2957.14,2607.14) U2.13@2923.81,2573.81 ; U2.14@2896.19,2646.19 cw(c2862.86,2612.86) 2910,2612.86 cw(c2957.14,2612.86) U2.14@2923.81,2646.19 ; U2.13 U2.14
  Bottom Layer w20: U2.13@2910,2540.47 cw(c2910,2493.33) 2943.34,2526.66 cw(c2976.67,2560) U2.13@2929.53,2560 ; U2.13 3070,2400 R11.1 ; R11.1@3210.37,2390.37 ccw(c3187.11,2367.11) 3187.11,2400 ccw(c3187.11,2432.89) R11.1@3210.37,2409.63
NetR11_2: R11.2 U2.1 U2.2 | length 1576.5
  Top Layer w20: U2.2@2596.19,2573.81 ccw(c2562.86,2607.14) 2610,2607.14 ccw(c2657.14,2607.14) U2.2@2623.81,2573.81 ; U2.1@2596.19,2646.19 cw(c2562.86,2612.86) 2610,2612.86 cw(c2657.14,2612.86) U2.1@2623.81,2646.19 ; U2.2@2610,2540.47 cw(c2610,2493.33) 2643.34,2526.66 cw(c2676.67,2560) U2.2@2629.53,2560 ; U2.1 U2.2 2742,2428 2742,2129 2875,1996 3015,1996 3160,2141 3160,2240 R11.2 ; R11.2@3206.38,2300 cw(c3173.49,2300) 3196.75,2276.75 cw(c3220,2253.49) R11.2@3220,2286.38
NetR11_3: R11.3 U2.10 | length 460.6
  Bottom Layer w20: U2.10@2910,2240.47 cw(c2910,2193.33) 2943.34,2226.66 cw(c2976.67,2260) U2.10@2929.53,2260 ; U2.10 2970,2200 R11.3 ; R11.3@3210.37,2190.37 ccw(c3187.11,2167.11) 3187.11,2200 ccw(c3187.11,2232.89) R11.3@3210.37,2209.63
NetR15_1: R15.1 U4.3 | length 1840.9
  Top Layer w20: U4.3@3469.54,2210.09 cw(c3493.6,2205.5) 3493.6,2230 ; U4.3 3490,2230 3517.78,2230 ; U4.3@3489.18,2206.34 cw(c3517.78,2200.89) 3517.78,2230 ; R15.1@3819.16,2792.71 ccw(c3831.13,2825.51) 3855.82,2800.82 ; R15.1 3850,2795 3878,2823 ; R15.1@3826.02,2811.5 ccw(c3842.99,2858.01) 3878,2823 ; 3517.78,2230 3550,2262.22 3550,2633.84 3446.84,2737 3362.44,2737 3362.44,2825 3390.44,2853 3553,2853 3754,3054 3824,3054 3878,3000 3878,2823
NetR16_1: R16.1 U4.5 | length 1036.1
  Top Layer w20: U4.5@3750.47,2110 ccw(c3703.33,2110) 3736.66,2143.34 ccw(c3770,2176.67) U4.5@3770,2129.53 ; U4.5 3710,2170 3710,2825 R16.1 ; R16.1@3802.44,2935 cw(c3760.05,2935) 3790.02,2905.02 cw(c3820,2875.05) R16.1@3820,2917.44
NetR17_1: R17.1 U5.3 | length 768.3
  Top Layer w20: R17.1 4745,2890 5045,2890 5045,2630 U5.3 ; R17.1@4747.42,2867.58 cw(c4801.53,2813.47) 4801.53,2890 ; U5.3@4998.81,2616.19 cw(c5032.14,2582.86) 5032.14,2630 cw(c5032.14,2677.14) U5.3@4998.81,2643.81
P10: R28.2 STC.18 | length 450.3
  Top Layer w20: R28.2@4340,4622.44 cw(c4340,4580.05) 4369.98,4610.02 cw(c4399.95,4640) R28.2@4357.56,4640 ; R28.2 4437.56,4542.44 4437.56,4442.44 4460,4420 ; STC.18@4484.14,4409.66 ccw(c4460,4386.67) 4460,4420 ; STC.18@4484.14,4430.34 cw(c4460,4453.33) 4460,4420 ; STC.18 4460,4420
P11: R27.2 STC.19 | length 401.6
  Top Layer w20: R27.2@4340,4502.44 cw(c4340,4460.05) 4369.98,4490.02 cw(c4399.95,4520) R27.2@4357.56,4520 ; R27.2 4397,4463 4397,4411 4488,4320 STC.19 ; 4457.44,4350.56 ccw(c4495,4388.11) STC.19@4495,4335
P12: R26.2 STC.20 | length 448.3
  Top Layer w20: R26.2@4327.58,4387.58 cw(c4297.61,4357.61) 4340,4357.61 cw(c4382.39,4357.61) R26.2@4352.42,4387.58 ; R26.2 4340,4280 4400,4220 STC.20 ; STC.20@4484.39,4209.39 ccw(c4458.79,4183.79) 4458.79,4220 ccw(c4458.79,4256.21) STC.20@4484.39,4230.61
P13: R23.1 STC.21 SW3.1 | length 3169.2
  Top Layer w20: SW3.1@3295.55,3226.95 ccw(c3248.61,3273.89) 3315,3273.89 ccw(c3381.39,3273.89) SW3.1@3334.45,3226.95 ; SW3.1@3295.55,3413.05 cw(c3248.61,3366.11) 3315,3366.11 cw(c3381.39,3366.11) SW3.1@3334.45,3413.05 ; SW3.1@3315,3195 SW3.1@3315,3445
  Bottom Layer w20: SW3.1@3302.5,3457.5 cw(c3374.93,3457.5) 3323.71,3508.71 ; SW3.1@3303.73,3482.59 ccw(c3295.91,3500) 3315,3500 ; SW3.1@3315,3445 3315,3500 ; SW3.1@3322.5,3457.5 cw(c3443.21,3457.5) 3357.86,3542.86 ; SW3.1@3326.27,3482.59 cw(c3334.09,3500) 3315,3500 ; SW3.1@3342.5,3457.5 cw(c3511.49,3457.5) 3392,3577 ; R23.1@3925,4107.44 cw(c3925,4065.05) 3954.98,4095.02 cw(c3984.95,4125) R23.1@3942.56,4125 ; R23.1 3983,4067 4318,4067 4371,4120 4450,4120 ; STC.21@4484.39,4109.39 ccw(c4458.79,4083.79) 4458.79,4120 ccw(c4458.79,4156.21) STC.21@4484.39,4130.61 ; STC.21 4450,4120 ; 3315,3500 3434.34,3619.34 4241.34,3619.34 4383,3761 4383,4053 4450,4120
P14: R22.1 STC.22 SW2.1 | length 2840.8
  Top Layer w20: SW2.1@3595.55,3226.95 ccw(c3548.61,3273.89) 3615,3273.89 ccw(c3681.39,3273.89) SW2.1@3634.45,3226.95 ; SW2.1@3595.55,3413.05 cw(c3548.61,3366.11) 3615,3366.11 cw(c3681.39,3366.11) SW2.1@3634.45,3413.05 ; SW2.1@3615,3195 SW2.1@3615,3445 ; R22.1 4143,4183 4272,4183 4435,4020 STC.22 ; R22.1@4085,4142.56 ccw(c4085,4184.95) 4114.98,4154.98 ccw(c4144.95,4125) R22.1@4102.56,4125 ; STC.22@4484.39,4009.39 ccw(c4458.79,3983.79) 4458.79,4020 ccw(c4458.79,4056.21) STC.22@4484.39,4030.61
  Bottom Layer w20: SW2.1@3602.5,3457.5 cw(c3674.93,3457.5) 3623.71,3508.71 ; SW2.1@3603.73,3482.59 ccw(c3595.91,3500) 3615,3500 ; SW2.1@3615,3445 3615,3500 ; SW2.1@3622.5,3457.5 cw(c3743.21,3457.5) 3657.86,3542.86 ; SW2.1@3626.27,3482.59 cw(c3634.09,3500) 3615,3500 ; SW2.1@3642.5,3457.5 cw(c3811.49,3457.5) 3692,3577 ; STC.22@4484.39,4009.39 ccw(c4458.79,3983.79) 4458.79,4020 ccw(c4458.79,4056.21) STC.22@4484.39,4030.61 ; STC.22 4450,4020 4423,3993 4423,3700 4302,3579 3694,3579 3615,3500
P15: R21.1 STC.23 SW1.1 | length 2188.7
  Top Layer w20: SW1.1@3895.55,3226.95 ccw(c3848.61,3273.89) 3915,3273.89 ccw(c3981.39,3273.89) SW1.1@3934.45,3226.95 ; SW1.1@3895.55,3413.05 cw(c3848.61,3366.11) 3915,3366.11 cw(c3981.39,3366.11) SW1.1@3934.45,3413.05 ; SW1.1@3902.5,3457.5 cw(c3974.93,3457.5) 3923.71,3508.71 ; SW1.1@3903.73,3482.59 ccw(c3895.91,3500) 3915,3500 ; SW1.1@3915,3195 3915,3445 3915,3500 ; SW1.1@3922.5,3457.5 cw(c4043.21,3457.5) 3957.86,3542.86 ; SW1.1@3926.27,3482.59 cw(c3934.09,3500) 3915,3500 ; SW1.1@3942.5,3457.5 cw(c4111.49,3457.5) 3992,3577 ; R21.1@4232.58,4112.58 cw(c4202.61,4082.61) 4245,4082.61 cw(c4287.39,4082.61) R21.1@4257.42,4112.58 ; R21.1@4245,4107.44 cw(c4245,4065.05) 4274.98,4095.02 cw(c4304.95,4125) R21.1@4262.56,4125 ; STC.23@4484.39,3909.39 ccw(c4458.79,3883.79) 4458.79,3920 ccw(c4458.79,3956.21) STC.23@4484.39,3930.61 ; STC.23 4450,3920 R21.1 4245,4005 4165,3925 4165,3690 4115,3640 4055,3640 3915,3500
P16: STC.24
P17: STC.25
P20: J2.7 STC.26 | length 4056.1
  Top Layer w20: v1@4463,2362 ccw(c4426.79,2362) 4452.39,2387.61 ccw(c4478,2413.21) v1@4478,2377 ; v1(4478,2362) 4440,2400 4440,3620 STC.26 ; STC.26@4484.39,3609.39 ccw(c4458.79,3583.79) 4458.79,3620 ccw(c4458.79,3656.21) STC.26@4484.39,3630.61
  Bottom Layer w20: v1(4478,2362) 5411,2362 5615,2566 5615,3685 J2.7 ; v1@4488.61,2351.39 cw(c4514.21,2325.79) 4514.21,2362 cw(c4514.21,2398.21) v1@4488.61,2372.61 ; J2.7@5520,3765 cw(c5520,3728.79) 5545.61,3754.39 cw(c5571.21,3780) J2.7@5535,3780
P21: J2.8 STC.27 | length 2780.5
  Top Layer w20: v1@5439.39,3251.61 ccw(c5413.79,3277.21) 5450,3277.21 ccw(c5486.21,3277.21) v1@5460.61,3251.61 ; v1(5450,3241) 5450,3810 J2.8 ; J2.8@5505,3880 cw(c5468.79,3880) 5494.39,3854.39 cw(c5520,3828.79) J2.8@5520,3865
  Bottom Layer w20: STC.27@4484.39,3509.39 ccw(c4458.79,3483.79) 4458.79,3520 ccw(c4458.79,3556.21) STC.27@4484.39,3530.61 ; STC.27 4229,3520 4159,3450 4159,3350 4214,3295 4928,3295 4999,3366 5325,3366 v1(5450,3241) ; v1@5435,3241 ccw(c5398.79,3241) 5424.39,3266.61 ccw(c5450,3292.21) v1@5450,3256
P22: J2.9 R13.2 STC.1 U4.7 | length 5947.9
  Top Layer w20: R13.2@4020,2322.44 cw(c4020,2280.05) 4049.98,2310.02 cw(c4079.95,2340) R13.2@4037.56,2340 ; R13.2 4061.92,2298.08 ; v1@4603.39,3543.39 cw(c4577.79,3517.79) 4614,3517.79 cw(c4650.21,3517.79) v1@4624.61,3543.39 ; v1(4614,3554) 4614,2378.65 4533.42,2298.08 4061.92,2298.08 ; J2.9@5505,3980 cw(c5468.79,3980) 5494.39,3954.39 cw(c5520,3928.79) J2.9@5520,3965 ; J2.9 5395,3855 5395,2434 4950,1989 4838,1989 4664,2163 4197,2163 4061.92,2298.08
  Bottom Layer w20: U4.7 3800,2340 R13.2 ; R13.2@4007.58,2327.58 ccw(c3977.61,2297.61) 3977.61,2340 ccw(c3977.61,2382.39) R13.2@4007.58,2352.42 ; v1@4614,3539 cw(c4614,3502.79) 4639.61,3528.39 cw(c4665.21,3554) v1@4629,3554 ; v1(4614,3554) 4748,3420 STC.1 ; STC.1@4784.39,3409.39 ccw(c4758.79,3383.79) 4758.79,3420 ccw(c4758.79,3456.21) STC.1@4784.39,3430.61
P23: J2.10 R12.2 STC.2 U4.1 | length 4145.4
  Top Layer w20: R12.2@3430,2642.44 cw(c3430,2600.05) 3459.98,2630.02 cw(c3489.95,2660) R12.2@3447.56,2660 ; R12.2 3470,2620 U4.1 ; U4.1@3456.19,2423.81 ccw(c3422.86,2457.14) 3470,2457.14 ccw(c3517.14,2457.14) U4.1@3483.81,2423.81 ; STC.2 4982,3520 5064,3438 v1(5064,3255) ; STC.2@4855.61,3509.39 cw(c4881.21,3483.79) 4881.21,3520 cw(c4881.21,3556.21) STC.2@4855.61,3530.61 ; v1@5053.39,3265.61 ccw(c5027.79,3291.21) 5064,3291.21 ccw(c5100.21,3291.21) v1@5074.61,3265.61 ; v1(5175,3735) J2.10 ; v1@5175,3750 ccw(c5175,3786.21) 5200.6,3760.6 ccw(c5226.21,3735) v1@5190,3735 ; J2.10@5505,4080 cw(c5468.79,4080) 5494.39,4054.39 cw(c5520,4028.79) J2.10@5520,4065
  Bottom Layer w20: R12.2 3503,2733 3878,2733 3965,2820 4452,2820 4887,3255 v1(5064,3255) ; R12.2@3430,2677.56 ccw(c3430,2719.95) 3459.98,2689.98 ccw(c3489.95,2660) R12.2@3447.56,2660 ; STC.2 4960,3520 v1(5175,3735) ; STC.2@4855.61,3509.39 cw(c4881.21,3483.79) 4881.21,3520 cw(c4881.21,3556.21) STC.2@4855.61,3530.61 ; v1@5053.39,3244.39 ccw(c5027.79,3218.79) 5027.79,3255 ccw(c5027.79,3291.21) v1@5053.39,3265.61 ; v1@5160,3735 cw(c5123.78,3735) 5149.39,3709.39 cw(c5175,3683.78) v1@5175,3720
P24: J2.11 STC.12 | length 1033.9
  Bottom Layer w20: STC.12 5051,4520 5052,4521 5313,4521 5384,4450 5384,4316 J2.11 ; STC.12@4855.61,4509.39 cw(c4881.21,4483.79) 4881.21,4520 cw(c4881.21,4556.21) STC.12@4855.61,4530.61 ; J2.11@5505,4180 ccw(c5468.79,4180) 5494.39,4205.61 ccw(c5520,4231.21) J2.11@5520,4195
P25: J2.12 STC.13 | length 1058.6
  Bottom Layer w20: STC.13 4960,4620 5008,4572 5424,4561 5424,4376 J2.12 ; STC.13@4855.61,4609.39 cw(c4881.21,4583.79) 4881.21,4620 cw(c4881.21,4656.21) STC.13@4855.61,4630.61 ; J2.12@5505,4280 ccw(c5468.79,4280) 5494.39,4305.61 ccw(c5520,4331.21) J2.12@5520,4295
P26: J2.13 STC.15 | length 1619.7
  Top Layer w20: STC.15 4643,4720 4776,4853 5385,4853 5438,4800 v1(5438,4640) ; STC.15@4555.61,4709.39 cw(c4581.21,4683.79) 4581.21,4720 cw(c4581.21,4756.21) STC.15@4555.61,4730.61 ; v1@5427.39,4650.61 ccw(c5401.79,4676.21) 5438,4676.21 ccw(c5474.21,4676.21) v1@5448.61,4650.61
  Bottom Layer w20: v1(5438,4640) 5464,4614 5464,4436 J2.13 ; J2.13@5505,4380 ccw(c5468.79,4380) 5494.39,4405.61 ccw(c5520,4431.21) J2.13@5520,4395
P27: J2.14 R1.2 R2.2 STC.16 U5.5 U5.7 | length 5591.7
  Top Layer w20: R2.2@4322.58,2452.42 ccw(c4292.61,2482.39) 4335,2482.39 ccw(c4377.39,2482.39) R2.2@4347.42,2452.42 ; R1.2@4327.58,2647.58 cw(c4309.68,2629.68) 4335,2629.68 ; R2.2 4335,2655 R1.2 ; 4335,2605.54 cw(c4394.46,2605.54) R1.2@4352.42,2647.58 ; STC.16 4600,4620 4768,4788 5314,4788 5383,4719 5383,4617 J2.14 5393,4353 5393,4026.73 5305.27,3939 5301.22,3939 5110,3747.78 5110,3700 5136.38,3673.62 5214,3673.62 5345,3542.62 5345,2790 U5.7 5345,2670 5345,2590 U5.5 ; STC.16@4555.61,4609.39 cw(c4581.21,4583.79) 4581.21,4620 cw(c4581.21,4656.21) STC.16@4555.61,4630.61 ; U5.5@5285,2549.53 ccw(c5285,2596.67) 5318.34,2563.34 ccw(c5351.67,2530) U5.5@5304.53,2530 ; U5.7@5285,2710.47 cw(c5285,2663.33) 5318.34,2696.66 cw(c5351.67,2730) 5304.53,2730 cw(c5351.67,2730) 5318.34,2763.34 cw(c5285,2796.67) U5.7@5285,2749.53 ; J2.14@5520,4465 ccw(c5520,4428.79) 5494.39,4454.39 ccw(c5468.79,4480) 5505,4480 ccw(c5468.79,4480) 5494.39,4505.61 ccw(c5520,4531.21) J2.14@5520,4495
  Bottom Layer w20: R1.2 4630,2660 4860,2890 5125,2890 U5.7 ; R1.2@4352.42,2647.58 cw(c4382.39,2617.61) 4382.39,2660 cw(c4382.39,2702.39) R1.2@4352.42,2672.42 ; U5.7@5265.47,2730 ccw(c5218.33,2730) 5251.66,2763.34 ccw(c5285,2796.67) U5.7@5285,2749.53
P35: STC.11
P37: STC.17
"RS P32": J2.4 STC.8 | length 1197.2
  Bottom Layer w20: STC.8 5082,4120 5141,4061 5141,3859 J2.4 ; STC.8@4855.61,4109.39 cw(c4881.21,4083.79) 4881.21,4120 cw(c4881.21,4156.21) STC.8@4855.61,4130.61 ; J2.4@5505,3480 ccw(c5468.79,3480) 5494.39,3505.61 ccw(c5520,3531.21) J2.4@5520,3495
"RW P33": J2.5 STC.9 | length 1189.6
  Bottom Layer w20: STC.9 5069,4220 5188,4101 5188,3912 J2.5 ; STC.9@4855.61,4209.39 cw(c4881.21,4183.79) 4881.21,4220 cw(c4881.21,4256.21) STC.9@4855.61,4230.61 ; J2.5@5505,3580 ccw(c5468.79,3580) 5494.39,3605.61 ccw(c5520,3631.21) J2.5@5520,3595
"RXD P30": J3.3 STC.4 | length 953.6
  Top Layer w20: STC.4@4780,3720 cw(c4743.79,3720) 4769.39,3694.39 cw(c4795,3668.79) STC.4@4795,3705 ; STC.4 4795,3720 4740,3665 4740,3365 4868,3365 5070,3163 5070,3150 J3.3 ; 5045.2,3187.8 cw(c4997.4,3140) J3.3@5065,3140
"TXD P31": J3.4 STC.5 | length 1056.1
  Top Layer w20: STC.5@4784.39,3809.39 ccw(c4758.79,3783.79) 4758.79,3820 ccw(c4758.79,3856.21) STC.5@4784.39,3830.61 ; STC.5 4750,3820 4725,3795 4700,3770 4700,3715 4700,3325 4795,3325 J3.4 ; J3.4@4965,3140 ccw(c4928.79,3140) 4954.39,3165.61 ccw(c4980,3191.21) J3.4@4980,3155
V1: R15.2 U2.6 U2.7 | length 2341
  Top Layer w20: U2.7@2596.19,2073.81 ccw(c2562.86,2107.14) 2610,2107.14 ccw(c2657.14,2107.14) U2.7@2623.81,2073.81 ; U2.6@2596.19,2146.19 cw(c2562.86,2112.86) 2610,2112.86 cw(c2657.14,2112.86) U2.6@2623.81,2146.19 ; U2.7@2610,2040.47 cw(c2610,1993.33) 2643.34,2026.66 cw(c2676.67,2060) U2.7@2629.53,2060 ; U2.6 U2.7 2741,1929 3466,1929 3590,2053 3590,2717.56 3512.56,2795 R15.2 ; R15.2@3432.42,2782.58 cw(c3462.39,2752.61) 3462.39,2795 cw(c3462.39,2837.39) R15.2@3432.42,2807.42
V2: R8.1 R8.3 R16.2 U2.8 | length 1917.6
  Top Layer w20: U2.8 3020,2170 R8.3 ; U2.8@2910,2079.53 ccw(c2910,2126.67) 2943.34,2093.34 ccw(c2976.67,2060) U2.8@2929.53,2060 ; R8.3@3010.37,2930.37 cw(c2987.11,2907.11) 3020,2907.11 cw(c3052.89,2907.11) R8.3@3029.63,2930.37
  Bottom Layer w20: R8.1@2820,2926.38 cw(c2820,2893.49) 2843.25,2916.75 cw(c2866.51,2940) R8.1@2833.62,2940 ; R8.1 2874,2886 2966,2886 R8.3 3225,2935 R16.2 ; R8.3@3006.38,2940 cw(c2973.49,2940) 2996.75,2916.75 cw(c3020,2893.49) R8.3@3020,2926.38 ; R8.3@3029.39,2930.14 cw(c3052.07,2906.32) 3052.88,2939.2 cw(c3053.68,2972.07) R8.3@3029.86,2949.39 ; R16.2@3407.58,2922.58 ccw(c3377.61,2892.61) 3377.61,2935 ccw(c3377.61,2977.39) R16.2@3407.58,2947.42
VIN: C15.1 R7.2 R17.2 U2.5 U3.3 U3.6 | length 4857.2
  Top Layer w20: U3.6@1790,2810.47 cw(c1790,2763.33) 1823.34,2796.66 cw(c1856.67,2830) U3.6@1809.53,2830 ; U3.6 2059,2561 2059,2540 C15.1 2080,2400 R7.2 ; R7.2@2020,2357.56 ccw(c2020,2399.95) 2049.98,2369.98 ccw(c2079.95,2340) R7.2@2037.56,2340 ; C15.1@2066.38,2540 ccw(c2033.49,2540) 2056.75,2563.25 ccw(c2080,2586.51) C15.1@2080,2553.62 ; C15.1@2070.37,2530.37 cw(c2047.11,2507.11) 2080,2507.11 cw(c2112.89,2507.11) C15.1@2089.63,2530.37
  Bottom Layer w20: U3.3 U3.6 1847.56,2887.56 2723.07,2887.56 2780.63,2830 3051,2830 3097,2876 4259,2876 4263,2880 R17.2 ; U3.3@1503.81,2816.19 cw(c1537.14,2782.86) 1537.14,2830 cw(c1537.14,2877.14) U3.3@1503.81,2843.81 ; U3.6@1776.19,2816.19 ccw(c1742.86,2782.86) 1742.86,2830 ccw(c1742.86,2877.14) U3.6@1776.19,2843.81 ; U3.6@1790,2849.53 ccw(c1790,2896.67) 1823.34,2863.34 ccw(c1856.67,2830) U3.6@1809.53,2830 ; R7.2@2020,2322.44 cw(c2020,2280.05) 2049.98,2310.02 cw(c2079.95,2340) R7.2@2037.56,2340 ; R7.2 2100,2260 U2.5 ; U2.5@2596.19,2246.19 ccw(c2562.86,2212.86) 2562.86,2260 ccw(c2562.86,2307.14) U2.5@2596.19,2273.81 ; R17.2@4322.58,2867.58 ccw(c4292.61,2837.61) 4292.61,2880 ccw(c4292.61,2922.39) R17.2@4322.58,2892.42
X1: C17.1 CY1.2 STC.6 | length 850.4
  Top Layer w20: C17.1 5180,4100 CY1.2 ; C17.1@5080,4021 ccw(c5080,4071.7) 5115.85,4035.85 ccw(c5151.7,4000) C17.1@5101,4000 ; CY1.2@5165.15,4205.15 cw(c5129.3,4169.3) 5180,4169.3 cw(c5230.7,4169.3) CY1.2@5194.85,4205.15
  Bottom Layer w20: STC.6 5000,3920 C17.1 ; STC.6@4855.61,3909.39 cw(c4881.21,3883.79) 4881.21,3920 cw(c4881.21,3956.21) STC.6@4855.61,3930.61 ; C17.1@5059,4000 cw(c5008.3,4000) 5044.15,3964.15 cw(c5080,3928.3) C17.1@5080,3979
X2: C18.2 CY1.1 STC.7 | length 1209.3
  Top Layer w20: STC.7 4900,4020 4950,4070 4950,4300 5070,4420 CY1.1 5100,4500 C18.2 ; STC.7@4855.61,4009.39 cw(c4881.21,3983.79) 4881.21,4020 cw(c4881.21,4056.21) STC.7@4855.61,4030.61 ; C18.2@5085.15,4625.15 cw(c5049.3,4589.3) 5100,4589.3 cw(c5150.7,4589.3) C18.2@5114.85,4625.15 ; 5128.79,4471.21 cw(c5077.57,4420) CY1.1@5150,4420 ; 5150.51,4449.49 ccw(c5171,4469.97) CY1.1@5171,4441 ; CY1.1@5156.15,4405.15 ccw(c5120.3,4369.3) 5120.3,4420 ccw(c5120.3,4470.7) CY1.1@5156.15,4434.85
pads on no net: U3.1 U3.5 U3.8
copper on no net: | length 15610
  Top Layer w10: 995,1865 995,4990 5675,4990 5675,1865 995,1865

## Other copper
Top Layer:
  text "group11" at 4310,2005 h60